# Altium PCB Dentist_camera_extender_board_pcb_3.PcbDoc
Units mm, origin at the board's own origin, x right, y up, seen from the top; angles counter-clockwise.
Board outline 40 x 20.4 mm, 2 copper layers (Top Layer, Bottom Layer); 6 components, 35 nets, 38 pads, 3 vias.
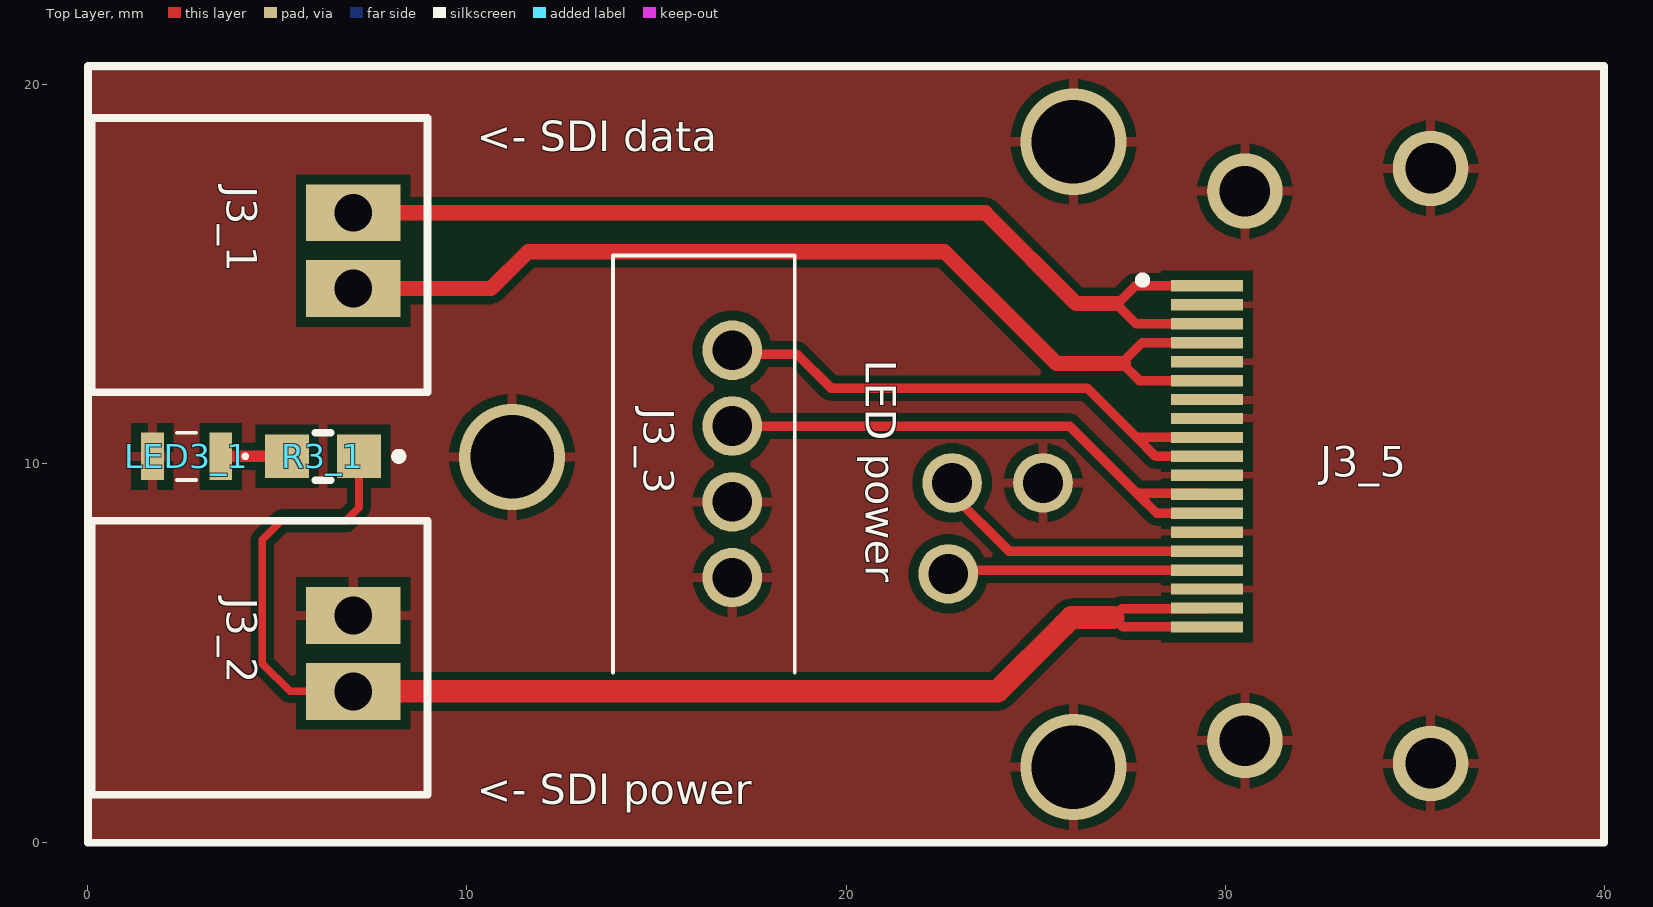
[diagram p0: Top Layer view]
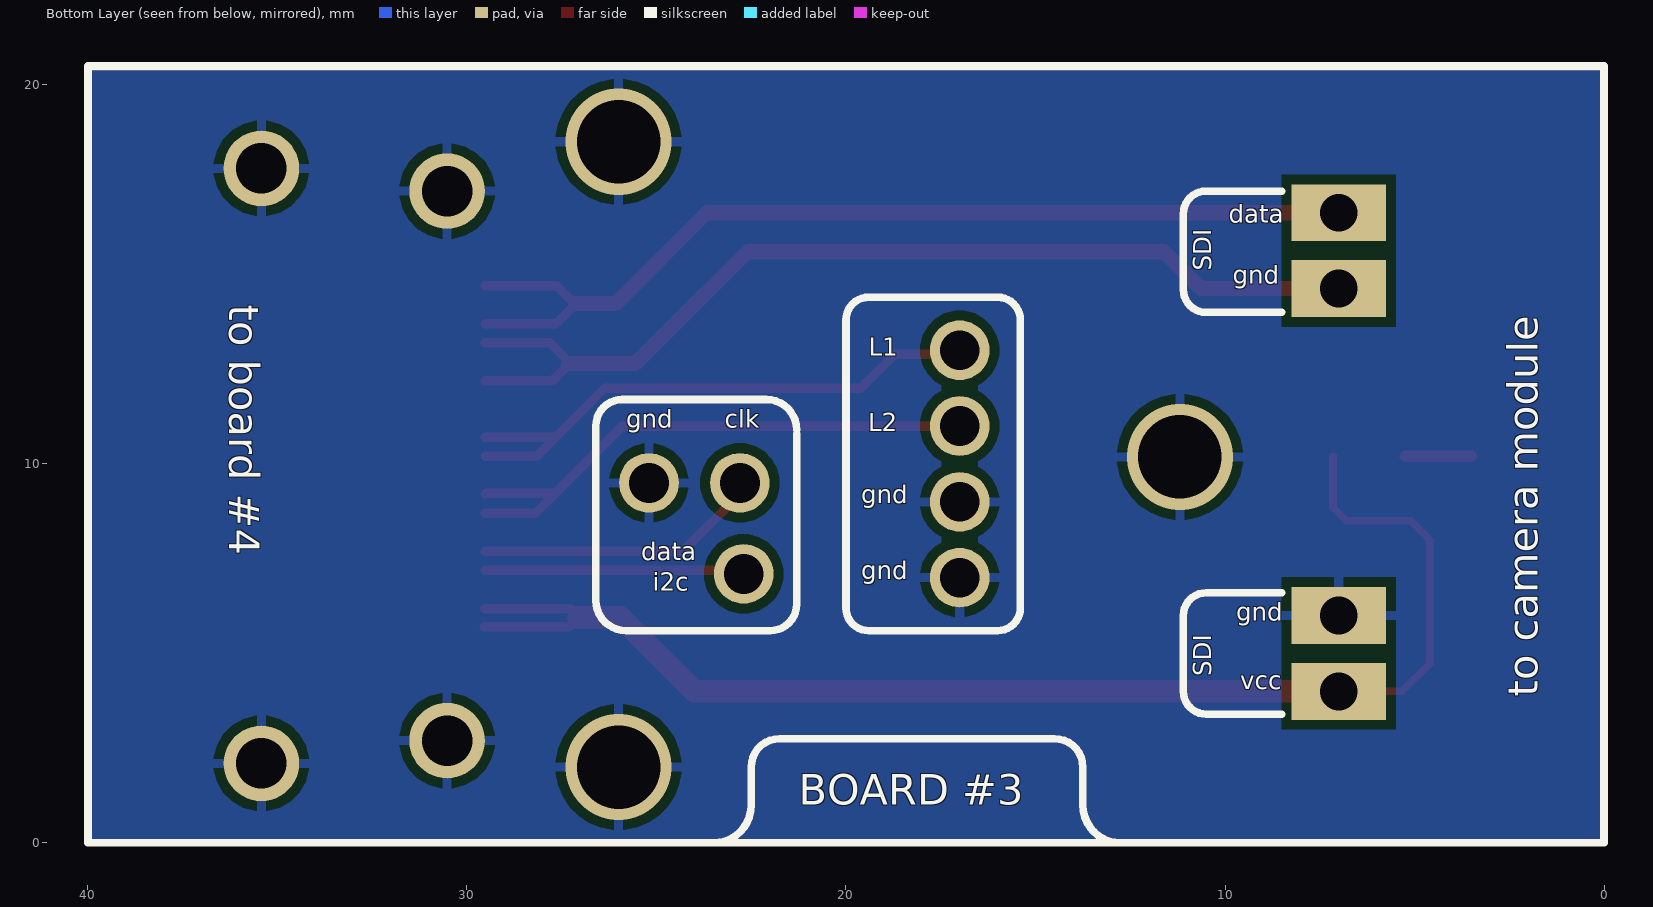
[diagram p1: Bottom Layer view, seen from below]
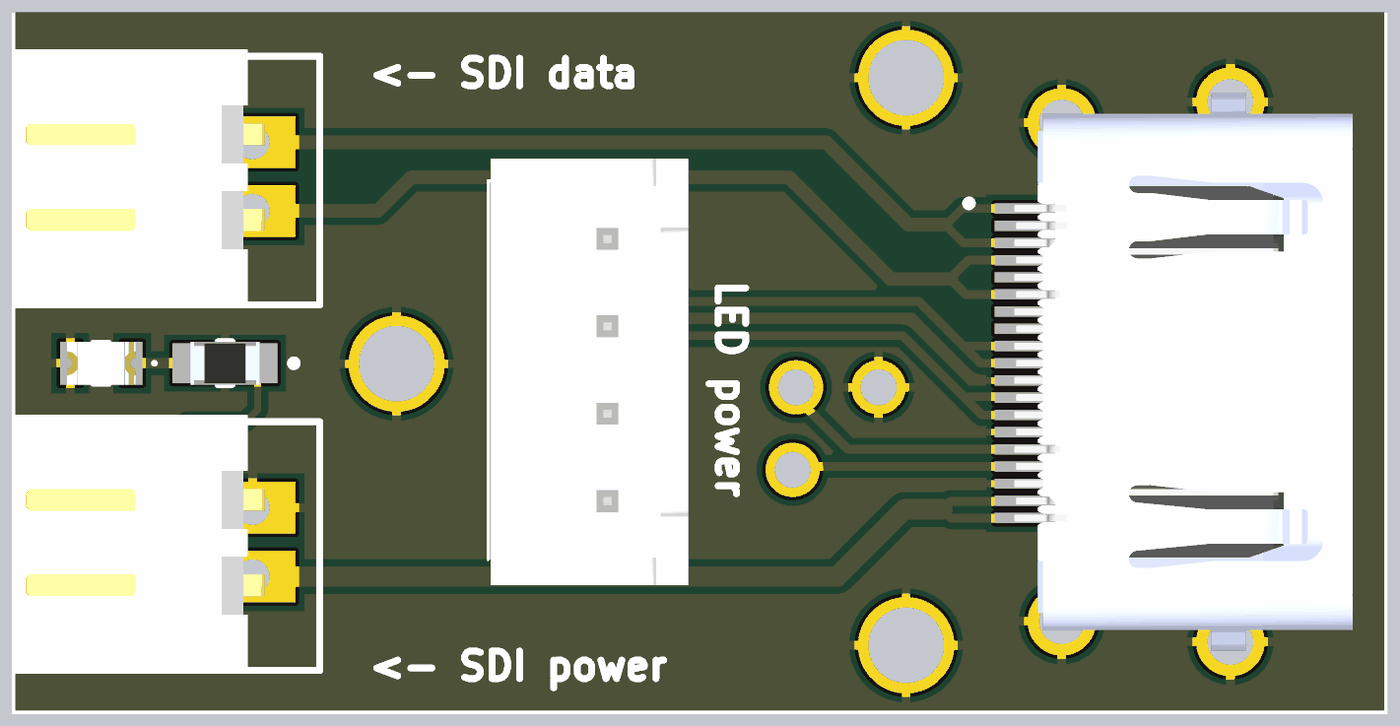
[diagram p2: 3D render of the assembled board from above, using the file's embedded part models]

## Layer stack, top to bottom
Top Solder: solder mask 0.0102, Solder Resist, Dk 3.5
Top Layer: signal copper 0.0356
Dielectric 1: dielectric 0.32, FR-4, Dk 4.8
Bottom Layer: signal copper 0.0356
Bottom Solder: solder mask 0.0102, Solder Resist, Dk 3.5

## Board outline
0,0 40,0 40,20.4 0,20.4

## Design rules (kind name [scope] priority, off if disabled: settings)
Clearance [All] p1: gap=0.254 ignorepadtopadclearanceinfootprint=FALSE except(0: Arc-Hole Track-Hole SMDPad-Hole THPad-Hole Via-Hole Fill-Hole Poly-Hole Region-Hole Text-Hole; 0.2: Arc-Arc Arc-Track Arc-SMDPad Arc-Fill Arc-Poly Arc-Region Track-Track Track-SMDPad Track-Fill Track-Poly Track-Region SMDPad-SMDPad)
PolygonConnect [All] p1: connectstyle=Relief reliefconductorwidth=0.254 reliefentries=4 polygonreliefangle="90 Angle" airgapwidth=0.254
RoutingVias [All] p1: holewidth=0.2 width=0.35 viastyle="Through Hole" minholewidth=0.2 minwidth=0.35 maxholewidth=3.2 maxwidth=4
SolderMaskExpansion [All] p1: expansion=0.102 istentingtop=FALSE
Width [All] p1: maxlimit=1 minlimit=0.2 preferedwidth=0.2 minimp=50.000000 maximp=50.000000 favimp=50.000000
30 further rules are at their usual default settings.

## Components (designator, comment, footprint, x,y, rotation, side; value= is the part's Value field where it differs from the comment)
J3_1 "SDI - IN" B02BJWPFSKRLFSN 7,14.627 r90 top
J3_2 "SDI - POWER" B02BJWPFSKRLFSN 7,4 r90 top
J3_3 "LED power" B04BJWPFSKRLFSN 17,7 r90 top
J3_5 "Sig_out" 10029449001RLF 33.375,10.2 r90 top locked
LED3_1 "Green" 1721SYGCS530E2TR8 2.6,10.2 r0 top
R3_1 "1k" ERA6AEB1020V 6.2,10.2 r180 top

## Footprints (in the part's own frame and the unit in brackets; to place one, negate y for a bottom-side part, rotate by r counter-clockwise, add the part's x,y. Pads: shape width x height; smd on the part's side, far side on the other; paste and mask are expansions set on the pad)
1721SYGCS530E2TR8 [mm]
  rect 0.6x1.25 smd: 1(0.9,0) 2(-0.9,0)
  silkscreen extent -0.25,-0.63 1.6,0.63, body extent -1,-0.63 1,0.63, height 1
10029449001RLF [mm]
  rect 0.3x1.9 smd: 1(4.499,3.85) 2(3.999,3.85) 3(3.499,3.85) 4(2.999,3.85) 5(2.499,3.85) 6(1.999,3.85) 7(1.499,3.85) 8(0.999,3.85) 9(0.499,3.85) 10(-0.001,3.85) 11(-0.501,3.85) 12(-1.001,3.85) 13(-1.501,3.85) 14(-2.001,3.85) 15(-2.501,3.85) 16(-3.001,3.85) 17(-3.501,3.85) 18(-4.001,3.85) 19(-4.501,3.85)
  round 1.995 hole 1.33: MH1(-7.501,2.85) MH2(6.999,2.85) MH3(-8.101,-2.05) MH4(7.599,-2.05)
  silkscreen extent 4.6,5.5 4.7,5.6, body extent -8.35,-5.6 7.85,4.25, height 6.03
B02BJWPFSKRLFSN [mm]
  rect 1.5x2.5 hole 1: 1(0,0) 2(2,0)
  silkscreen extent -2.73,-1.96 4.5,6.91, body extent -2.73,-0.37 4.7,6.99, height 5.84
B04BJWPFSKRLFSN [mm]
  round 1.575 hole 1.05: 1(0,0) 2(2,0) 3(4,0) 4(6,0)
  silkscreen extent -2.5,-1.65 8.5,3.15, body extent -3.26,-2.67 9.14,3.08, height 7
ERA6AEB1020V [mm]
  rect 1.15x1.15 smd: 1(-0.95,0) 2(0.95,0)
  silkscreen extent -2.1,-0.63 0.2,0.63, body extent -1,-0.63 1,0.63, height 0.5

## Part data
J3_1 J3_2: library part B02B-JWPF-SK-R_LF__SN_, "Connector", Arrow Part Number=B02B-JWPF-SK-R(LF)(SN), Manufacturer_Name="JST (JAPAN SOLDERLESS TERMINALS)", Arrow Price/Stock=https://www.arrow.com/en/products/b02b-jwpf-sk-r-lf-sn/jst-manufacturing, Datasheet Link=https://datasheet.datasheetarchive.com/originals/dk/DKDS-13/257039.pdf, Height=16.6mm, Manufacturer_Part_Number=B02B-JWPF-SK-R(LF)(SN)
J3_3: library part B04B-JWPF-SK-R_LF__SN_, "Connector", Manufacturer_Name="JST (JAPAN SOLDERLESS TERMINALS)", Manufacturer_Part_Number=B04B-JWPF-SK-R(LF)(SN), Datasheet Link=https://componentsearchengine.com/Datasheets/2/B04B-JWPF-SK-R(LF)(SN).pdf, Height=16.6mm
J3_5: library part 10029449-001RLF, "10029449-001RLF", Manufacturer_Name=Amphenol, Mouser Part Number=649-10029449-001RLF, Arrow Part Number=10029449-001RLF, Arrow Price/Stock=https://www.arrow.com/en/products/10029449-001rlf/amphenol-fci?region=nac, Datasheet Link=https://cdn.amphenol-icc.com/media/wysiwyg/files/drawing/10029449.pdf, Height=6.3mm, Manufacturer_Part_Number=10029449-001RLF, Mouser Price/Stock=https://www.mouser.co.uk/ProductDetail/Amphenol-FCI/10029449-001RLF?qs=D%252By4jQJzx8L60NhBOOKSqQ%3D%3D
LED3_1: library part 17-21SYGC_S530-E2_TR8, "LED", Arrow Part Number=17-21SYGC/S530-E2/TR8, Manufacturer_Name=Everlight, Mouser Part Number=638-1721SYGCS530E2, Arrow Price/Stock=https://www.arrow.com/en/products/17-21sygcs530-e2tr8/everlight-electronics?region=nac, Datasheet Link=https://media.digikey.com/pdf/Data%20Sheets/Everlight%20PDFs/17-21SYGC,S530-E2,TR8.pdf, Height=1.1mm, Manufacturer_Part_Number=17-21SYGC/S530-E2/TR8, Mouser Price/Stock=https://www.mouser.co.uk/ProductDetail/Everlight/17-21SYGC-S530-E2-TR8?qs=8PzhAHr7IdMM%252BF4DSbsAKQ%3D%3D
R3_1: library part ERA6ARB103V, "ERA6ARB103V", Manufacturer_Name=Panasonic, Arrow Part Number=ERA6ARB103V, Arrow Price/Stock=https://www.arrow.com/en/products/era-6arb103v/panasonic, Datasheet Link=https://industrial.panasonic.com/cdbs/www-data/pdf/RDM0000/AOA0000C307.pdf, Height=0.6mm, Manufacturer_Part_Number=ERA6ARB103V

## Free pads (board coordinates)
  round 1.575 hole 1.05: 13(22.7,7.1) 14(22.8,9.5) 14(25.2,9.5)

## Via types
v1: diameter 2.8, hole 2.2, Top Layer to Bottom Layer, 3 vias

## Nets (pads, with @x,y where several pads share a name; then routed paths per layer and width w, separated by ;. In a path a pad name is that pad's centre, name@x,y a point inside that pad or via, vN(x,y) a via of type N, cw(c..) or ccw(c..) an arc to the next point about the centre after c; other vN are vias at no path point)
GND: J3_2.2 J3_3.1 J3_3.2 J3_5.2 J3_5.5 J3_5.7 J3_5.8 J3_5.11 J3_5.14 J3_5.17 J3_5.MH1 J3_5.MH2 J3_5.MH3 J3_5.MH4 LED3_1.2 pad.14@25.2,9.5
  other v1: 26,2 11.19,10.187 26,18.5
GND_SDI: J3_1.1 J3_5.4 J3_5.6 | length 26.7
  Top Layer w0.2: 27.408,12.684 27.408,12.796
  Top Layer w0.25: 27.307,12.631 27.74,12.199 J3_5.6 ; 27.408,12.796 27.811,13.199 J3_5.4
  Top Layer w0.4: J3_1.1 10.635,14.627 11.608,15.6 22.6,15.6 24.601,13.599 25.552,12.648 27.319,12.648
NetD1_1: 
NetD2_1: 
NetJ1_1: 
NetJ1_2: 
NetJ1_3: 
NetJ1_4: 
NetJ1_5: 
NetJ1_6: 
NetJ1_7: 
NetJ1_8: 
NetJ1_9: 
NetJ1_10: 
NetJ1_11: 
NetJ1_12: 
NetJ1_13: 
NetJ1_14: 
NetJ1_15: 
NetJ1_16: 
NetJ1_17: 
NetJ1_18: 
NetJ1_19: 
NetJ1_20: 
NetJ1_21: 
NetJ1_22: 
NetJ1_23: 
NetJ1_24: 
NetJ2_1_13: J3_3.3 J3_5.12 J3_5.13 | length 15.3
  Top Layer w0.25: J3_3.3 25.9,11 27.676,9.224 ; J3_5.13 28.201,8.699 27.676,9.224 ; J3_5.12 29.5,9.224 28.44,9.224 27.676,9.224
NetJ2_1_28: J3_3.4 J3_5.9 J3_5.10 | length 15.5
  Top Layer w0.25: J3_3.4 17.1,12.9 18.7,12.9 19.6,12 26.367,12 27.664,10.703 ; J3_5.9@29.521,10.703 27.664,10.703 ; J3_5.10 28.168,10.199 27.664,10.703
NetJ3_1_2: J3_1.2 J3_5.1 J3_5.3 | length 26.3
  Top Layer w0.25: 27.116,14.236 27.653,13.699 J3_5.3 ; 27.142,14.209 27.632,14.699 J3_5.1
  Top Layer w0.4: J3_1.2 23.673,16.627 26.064,14.236 27.136,14.236
NetJ3_4_1: J3_5.16 pad.13 | length 6.9
  Top Layer w0.25: pad.13 22.799,7.199 J3_5.16
NetJ3_4_2: J3_5.15 pad.14@22.8,9.5 | length 7.6
  Top Layer w0.25: pad.14@22.8,9.5 22.8,9.2 24.301,7.699 J3_5.15
NetLED3_1_1: LED3_1.1 R3_1.2 | length 1.7
  Top Layer w0.3: LED3_1.1 R3_1.2
VCC_SDI: J3_2.1 J3_5.18 J3_5.19 R3_1.1 | length 36.3
  Top Layer w0.2: J3_2.1 5.333,4 4.6,4.733 4.6,8 5.1,8.5 6.8,8.5 7.15,8.85 R3_1.1
  Top Layer w0.25: J3_5.18@29.535,6.184 27.284,6.184 27.05,5.95 27.301,5.699 J3_5.19@29.55,5.699
  Top Layer w0.6: J3_2.1 24,4 25.75,5.75 25.95,5.95 27.05,5.95

## Polygon pours and split planes (outlines as drawn)
GND on Bottom Layer "GND_L01_P000" (solid, remove dead copper, pour order 0): 0,0 40,0 40,20.4 0,20.4
GND on Top Layer "GND_L02_P001" (solid, remove dead copper, pour order 1): 0,0 40,0 40,20.4 0,20.4

## Silkscreen, mask and mechanical layers (free items; w line width, h text height)
Top Overlay:
  lines w0.2: 0,0 0,20.5 40,20.5 40,0 0,0
  text "<- SDI data" at 10.254,18.254 h0.8
  text "LED power" at 20.521,12.746 h0.8 r270
  text "<- SDI power" at 10.254,1.021 h0.8
Bottom Overlay:
  lines w0.2: 8.5,3.4 10.5,3.4 ccw(c10.5,4) 11.1,4 11.1,4.3 11.1,5.7 11.1,6 ccw(c10.5,6) 10.5,6.6 8.5,6.6 ; 8.5,14 10.5,14 ccw(c10.5,14.6) 11.1,14.6 11.1,14.9 11.1,16.3 11.1,16.6 ccw(c10.5,16.6) 10.5,17.2 8.5,17.2 ; 21.3,10.8 21.3,6.3 ccw(c22,6.3) 22,5.6 25.8,5.6 ccw(c25.8,6.4) 26.6,6.4 26.6,11 ccw(c25.9,11) 25.9,11.7 22.1,11.7 ccw(c22.1,10.9) 21.3,10.9 ; 0,0 0,20.5 40,20.5 40,0 0,0 ; 12.75,0 ccw(c12.75,1) 13.75,1 13.75,2 cw(c14.5,2) 14.5,2.75 21.75,2.75 cw(c21.75,2) 22.5,2 22.5,1 ccw(c23.5,1) 23.5,0 12.75,0 ; 15.4,6.2 ccw(c16,6.2) 16,5.6 17.4,5.6 19.4,5.6 ccw(c19.4,6.2) 20,6.2 20,6.5 20,13.5 20,13.8 ccw(c19.4,13.8) 19.4,14.4 17.4,14.4 16,14.4 ccw(c16,13.8) 15.4,13.8 15.4,13.5 15.4,6.5 15.4,6.2
  text "data" at 9.9,16.2 h0.8
  text "SDI" at 10.2,15.1 h0.8 r270
  text "gnd" at 9.8,14.6 h0.8
  text "to board #4" at 36.271,14.196 h0.8 r90
  text "L1" at 19.4,12.7 h0.8
  text "clk" at 23.2,10.8 h0.8
  text "gnd" at 25.8,10.8 h0.8
  text "L2" at 19.415,10.709 h0.8
  text "gnd" at 19.6,8.8 h0.8
  text "data" at 25.4,7.3 h0.8
  text "gnd" at 19.6,6.8 h0.8
  text "i2c" at 25.1,6.5 h0.8
  text "gnd" at 9.7,5.7 h0.8
  text "SDI" at 10.2,4.4 h0.8 r270
  text "vcc" at 9.6,3.9 h0.8
  text "to camera module" at 1.754,3.854 h0.8 r270
  text "BOARD #3" at 21.246,1.004 h0.8